# Altium PCB ConstSegmentClock - Logic.PcbDoc
Units mm, origin at the board's own origin, x right, y up, seen from the top; angles counter-clockwise.
Board outline 50.8 x 20.32 mm, 2 copper layers (Component Side, Bottom Layer), stack 1.57 mm thick; 36 components, 47 nets, 133 pads, 38 vias.
Unrouted connection lines stored in the file: 22.
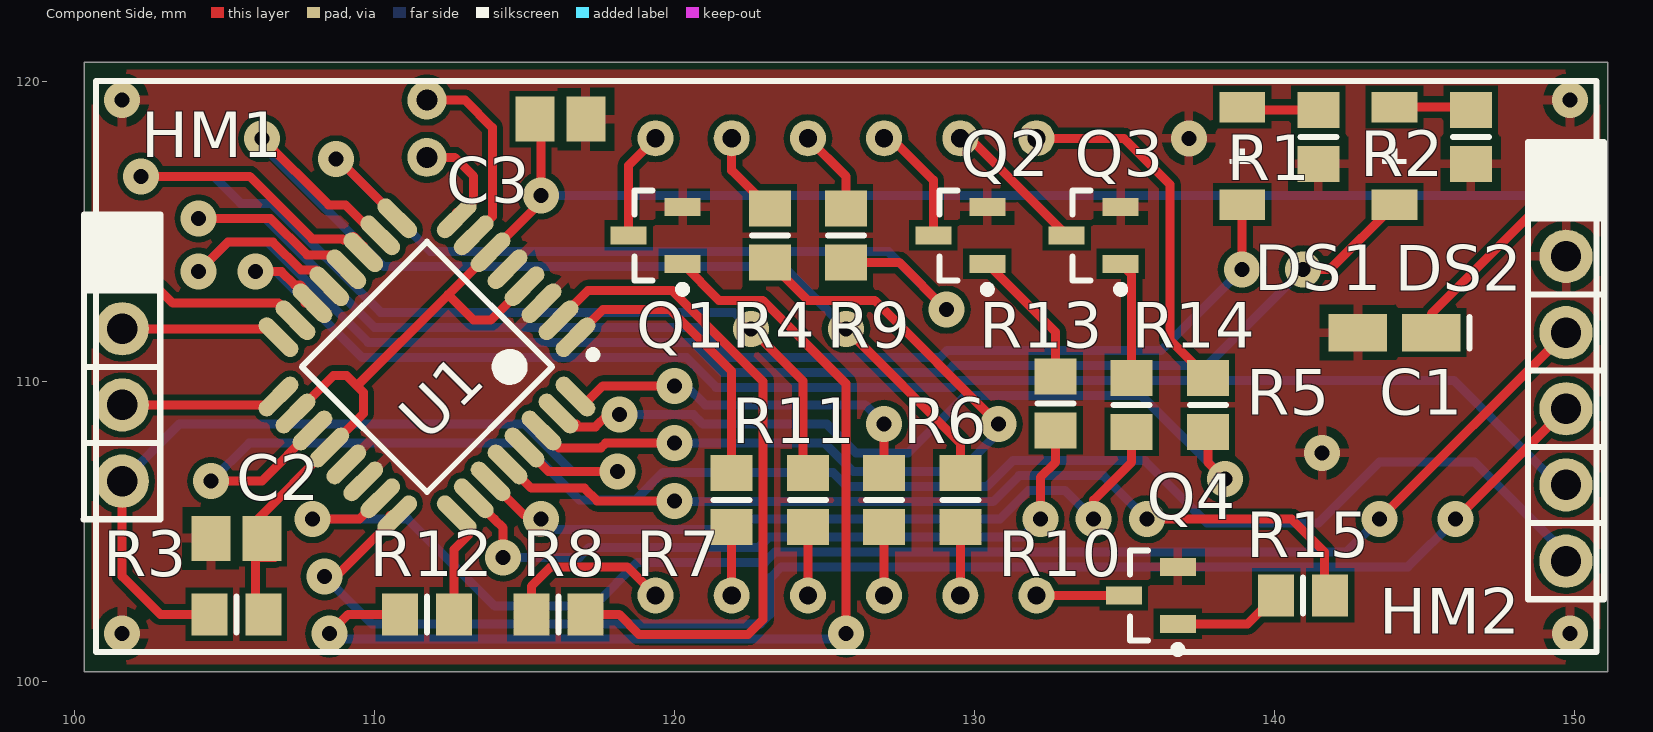
[diagram p0: Component Side view]
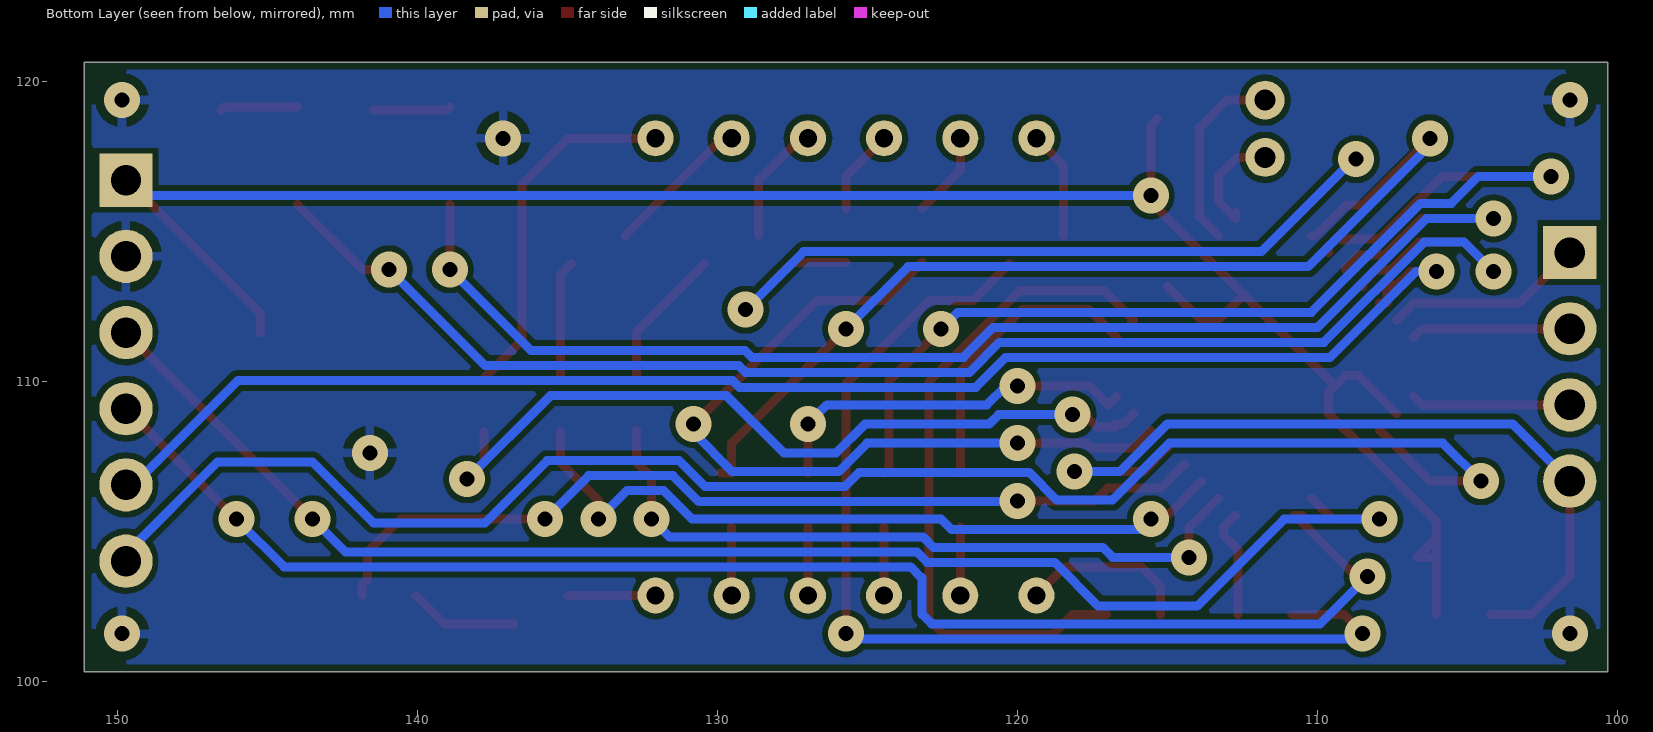
[diagram p1: Bottom Layer view, seen from below]

## Layer stack, top to bottom
Top Solder: solder mask 0.0102, Solder Resist, Dk 3.5
Component Side: signal copper 0.0356
Dielectric 1: core 1.4986, FR-4, Dk 4.2
Bottom Layer: signal copper 0.0356
Solder Side: solder mask 0.0102, Solder Resist, Dk 3.5

## Board outline
100.33,100.33 100.33,120.65 151.13,120.65 151.13,100.33

## Design rules (kind name [scope] priority, off if disabled: settings)
AcuteAngle "AcuteAngle 90" [All] p1: minimum=9.00000000000000E+0001 checktracksonly=FALSE
Clearance "Clearance 0.2" [All] p1: gap=0.2
DiffPairsRouting "DiffPairsRouting 0.2/0.2" [All] p1: maxlimit=0.2 minlimit=0.2 mostfreqgap=0.2 toplayer_minwidth=0.2 toplayer_maxwidth=0.2 toplayer_prefwidth=0.2 bottomlayer_minwidth=0.2 bottomlayer_maxwidth=0.2 bottomlayer_prefwidth=0.2 maxuncoupledlength=12.7
HoleSize "HoleSize 0.5" [All] p1: absolutevalues=TRUE maxlimit=2.54 minlimit=0.5 maxpercent=80.000 minpercent=20.000
MinimumAnnularRing "MinimumAnnularRing 0.35" [All] p1: minimumring=0.35
PlaneConnect "PlaneConnect 0.3 0.3" [All] p1: planeconnectstyle=Relief reliefexpansion=0.508 reliefentries=4 reliefconductorwidth=0.3 reliefairgap=0.3
PolygonConnect "PolygonConnect 0.3 0.3" [All] p1: connectstyle=Relief reliefconductorwidth=0.3 reliefentries=4 polygonreliefangle="90 Angle" airgapwidth=0.3
RoutingVias "RoutingVias 0.5 1.2" [All] p1: holewidth=0.5 width=1.2 viastyle="Through Hole" minholewidth=0.5 minwidth=1.2 maxholewidth=0.5 maxwidth=1.2
SMDEntry "SMDEntry Corner" [All] p1: side=FALSE corner=TRUE anyangle=FALSE
SolderMaskExpansion "SolderMaskExpansion 0.1" [All] p1: expansion=0.1
Width "Width 0.2/0.3/0.4" [All] p1: maxlimit=0.4 minlimit=0.2 preferedwidth=0.3 minimp=50.000000 maximp=50.000000 favimp=50.000000
27 further rules are at their usual default settings.

## Components (designator, comment, footprint, x,y, rotation, side; value= is the part's Value field where it differs from the comment)
B1 "XCPT14A4005PX" XCPT14A4005PX 107.188,164.846 r90 bottom
C1 "4.7uF" KEMET_A 144.018,111.633 r180 top
C2 "0.1uF" CAPC2012N 105.41,104.775 r0 top
C3 "0.1uF" CAPC2012N 116.205,118.745 r180 top
C4 "10uF" KEMET_A 119.888,164.846 r180 top
C5 "10uF" KEMET_A 119.888,168.656 r180 top
DS1 "OK" LED_1206 138.938,117.521 r90 top
DS2 "LOL" LED_1206 144.018,117.521 r90 top
HM1 "68001-204HLF" HEADER-1X4 101.6,114.3 r0 top locked
HM2 "68001-206HLF" HEADER-1X6 149.733,116.713 r0 top locked
J1 "KLDX-0202" KLDX-0202 137.668,172.546 r270 bottom
Q1 "BC817" SOT23-3L 119.38,114.874 r180 top
Q2 "BC817" SOT23-3L 129.54,114.874 r180 top
Q3 "BC817" SOT23-3L 133.985,114.874 r180 top
Q4 "BC817" SOT23-3L 135.89,102.87 r180 top
R1 "270" RESC2012N 141.478,118.156 r270 top
R2 "270" RESC2012N 146.558,118.156 r270 top
R3 "10K" RESC2012N 105.41,102.235 r180 top
R4 "270" RESC2012N 123.19,114.874 r270 top
R5 "270" RESC2012N 137.795,109.22 r270 top
R6 "270" RESC2012N 127,106.045 r90 top
R7 "270" RESC2012N 121.92,106.045 r90 top
R8 "270" RESC2012N 116.144,102.235 r0 top
R9 "270" RESC2012N 125.73,114.874 r270 top
R10 "270" RESC2012N 129.54,106.045 r90 top
R11 "270" RESC2012N 124.46,106.045 r90 top
R12 "1K" RESC2012N 111.76,102.235 r180 top
R13 "1K" RESC2012N 132.715,109.269 r90 top
R14 "1K" RESC2012N 135.255,109.22 r90 top
R15 "1K" RESC2012N 140.97,102.87 r180 top
R16 "270" RESC2012N 130.048,163.576 r90 bottom
R17 "270" RESC2012N 130.048,156.326 r90 bottom
SW1 "KAN0641-0431B" KAN0641 122.428,167.386 r180 bottom
SW2 "KAN0641-0431B" KAN0641 122.428,158.496 r180 bottom
U1 "ATmega48PA-AU" 32A_N 111.76,110.49 r225 top
U2 "REG1117-3.3" TI-DCY4_N 128.778,167.386 r0 top

## Footprints (in the part's own frame and the unit in brackets; to place one, negate y for a bottom-side part, rotate by r counter-clockwise, add the part's x,y. Pads: shape width x height; smd on the part's side, far side on the other; paste and mask are expansions set on the pad)
32A_N [mm] "Thin QFP, 32-Leads, Body 7x7mm, Pitch 0.8mm, IPC Medium Density"
  oval 1.65x0.55 smd: 1(-4.2,2.8) 2(-4.2,2) 3(-4.2,1.2) 4(-4.2,0.4) 5(-4.2,-0.4) 6(-4.2,-1.2) 7(-4.2,-2) 8(-4.2,-2.8) 17(4.2,-2.8) 18(4.2,-2) 19(4.2,-1.2) 20(4.2,-0.4) 21(4.2,0.4) 22(4.2,1.2) 23(4.2,2) 24(4.2,2.8)
  oval 0.55x1.65 smd: 9(-2.8,-4.2) 10(-2,-4.2) 11(-1.2,-4.2) 12(-0.4,-4.2) 13(0.4,-4.2) 14(1.2,-4.2) 15(2,-4.2) 16(2.8,-4.2) 25(2.8,4.2) 26(2,4.2) 27(1.2,4.2) 28(0.4,4.2) 29(-0.4,4.2) 30(-1.2,4.2) 31(-2,4.2) 32(-2.8,4.2)
  silkscreen extent -4.32,-2.95 2.95,3.75, body extent -3.5,-3.5 3.5,3.5, height 1.2
CAPC2012N [mm] "Chip Capacitor, Body 2.0x1.3mm, IPC Medium Density"
  rect 1.3x1.5 smd: 1(-0.85,0) 2(0.85,0)
  body extent -1.1,-0.72 1.1,0.72, height 1.1
HEADER-1X4 [mil]
  rect 70x70 hole 40: 1(0,0)
  round 70 hole 40: 2(0,-100) 3(0,-200) 4(0,-300)
  silkscreen extent -51,-350 50,50, body extent -50,-350 50,50, height 470
HEADER-1X6 [mil]
  rect 70x70 hole 40: 1(0,0)
  round 70 hole 40: 2(0,-100) 3(0,-200) 4(0,-300) 5(0,-400) 6(0,-500)
  silkscreen extent -50,-550 50,50, body extent -50,-550 50,50, height 470
KAN0641 [mm]
  rect 2x1.2 smd: 1(-4.25,2.25) 2(4.25,2.25) 3(4.25,-2.25)
  rect 2.2x1.2 smd: 4(-4.25,-2.25)
  silkscreen extent -3,-3 3.02,3.02, body extent -5.1,-3.1 4.9,2.9, height 5.07
KEMET_A [mm] "Molded Capacitor, 2-Leads, Body 3.2x1.6mm, IPC Medium Density"
  rect 1.95x1.25 smd: 1(-1.225,0) 2(1.225,0)
  silkscreen extent -2.5,-0.53 -2.5,0.53, body extent -1.7,-0.9 1.7,0.9, height 1.8
KLDX-0202 [mm]
  oval 2x5 hole 1 slot 3.5 at 90 deg: 1(13.9,0) 2(7.7,0)
  oval 5x2 hole 1 slot 3.5 at 0 deg: 3(10.7,-4.7)
  silkscreen extent 0,-4.32 14.5,4.32, body extent -0.4,-4.7 14.8,4.7, height 11
LED_1206 [mil]
  rect 40x60 smd: 1(-64,0) 2(64,0)
  silkscreen extent -10,-16 10,16, body extent -63,-31 63,31
RESC2012N [mm] "Chip Resistor, Body 2.0x1.3mm, IPC Medium Density"
  rect 1.2x1.4 smd: 1(-0.9,0) 2(0.9,0)
  silkscreen extent 0,-0.6 0,0.6, body extent -1.07,-0.7 1.07,0.7, height 0.65
SOT23-3L [mm] "SOT23, 3-Leads, Body 2.9x1.3mm, Pitch 0.95mm, Lead Span 2.5mm, IPC High Density"
  rect 1.2x0.6 smd: 1(-0.9,0.95) 2(-0.9,-0.95) 3(0.9,0)
  silkscreen extent -1.02,-1.5 0.7,1.92, body extent -0.7,-1.5 0.7,1.5, height 1.1
TI-DCY4_N [mm] "SOT223, 4-Leads, Body 6.5x3.5mm, Pitch 2.3mm, IPC Medium Density"
  rect 1.85x1 smd: 1(-3.175,2.3) 2(-3.175,0) 3(-3.175,-2.3)
  rect 1.85x3.2 smd: 4(3.175,0)
  silkscreen extent -3.3,-3.35 1.95,3.47, body extent -1.85,-3.35 1.85,3.35, height 1.8
XCPT14A4005PX [mm]
  rect 2x2 hole 1.016: 1(-3.81,0)
  round 2 hole 1.016: 2(3.81,0)
  silkscreen extent -7,-7 7,7, body extent -6.94,-6.99 7,6.99, height 7.2

## Part data
B1: "Piezoelectric ceramic buzzer"
C1 C4 C5: library part T491A***K***AH, "A size, STANDARD Tantalum Surface Mount Capacitors"
C2 C3: library part CGA4**X7R***********, "0805 size MULTILAYER CERAMIC CHIP CAPACITOR, General (Up to 50V)"
DS1 DS2: library part QTLP650C4TR, "Green LED, STANDARD BRIGHT 1206"
HM1: "1x4 PIN HEADER .100\" SR STRAIGHT"
HM2: "1x6 PIN HEADER .100\" SR STRAIGHT"
J1: "Low Voltage Power Supply Connector"
Q1 Q2 Q3 Q4: "45 V, 500 mA NPN general-purpose transistors"
R1 R2 R3 R4 R5 R6 R7 R8 R9 R10 R11 R12 R13 R14 R15 R16 R17: library part ERJ6GEYJ***V, "0805 size, STANDARD thick Film Chip Resistor"
SW1 SW2: "Tact switch, button SMD"
U1: "8-bit AVR Microcontroller, 4KB Flash, 256 Bytes EEPROM, 512 Bytes SRAM, 32-pin TQFP, Industrial Grade (-40°C to 85°C)"

## Free pads (board coordinates)
  round 1.3 hole 0.7: 1(111.76,117.475) 2(111.76,119.38)
  round 1.2 hole 0.61: 1(119.38,102.87) 2(121.92,102.87) 3(124.46,102.87) 4(127,102.87) 5(129.54,102.87) 6(132.08,102.87) 7(132.08,118.11) 8(129.54,118.11) 9(127,118.11) 10(124.46,118.11) 11(121.92,118.11) 12(119.38,118.11)

## Via types
v1: diameter 1.2, hole 0.5, Component Side to Bottom Layer, 38 vias

## Nets (pads, with @x,y where several pads share a name; then routed paths per layer and width w, separated by ;. In a path a pad name is that pad's centre, name@x,y a point inside that pad or via, vN(x,y) a via of type N, cw(c..) or ccw(c..) an arc to the next point about the centre after c; other vN are vias at no path point)
DISP_A: R4.2 U1.30 | length 26.6
  Component Side w0.3: U1.30 116.162,107.785 117.555,107.785 117.716,107.947 v1(120.012,107.947) ; R4.2 124.454,112.71 126.685,112.71 v1(130.81,108.585)
  Bottom Layer w0.3: v1(120.012,107.947) 125.023,107.947 125.973,106.997 129.517,106.997 130.81,108.29 v1(130.81,108.585)
DISP_B: R5.2 U1.31 | length 26.9
  Component Side w0.3: U1.31 116.493,108.585 116.741,108.585 116.741,108.486 117.376,108.486 117.79,108.9 v1(118.174,108.9) ; R5.2 137.795,107.315 v1(138.366,106.744)
  Bottom Layer w0.3: v1(118.174,108.9) 120.644,108.9 120.959,108.585 125.092,108.585 126.057,107.62 127.801,107.62 129.716,109.535 135.575,109.535 v1(138.366,106.744)
DISP_C: R6.2 U1.32 | length 12.8
  Component Side w0.3: U1.32 116.99,109.22 117.625,109.855 v1(120.015,109.855) ; R6.2 v1(127,108.585)
  Bottom Layer w0.3: v1(120.015,109.855) 120.396,109.855 121.031,109.22 126.365,109.22 v1(127,108.585)
DISP_D: R7.2 U1.1 | length 9.8
  Component Side w0.3: U1.1 117.625,112.395 119.869,112.395 121.92,110.344 R7.2
DISP_DIGIT_0: R12.1 U1.25 | length 3.7
  Component Side w0.3: R12.1 112.66,104.397 113.139,104.876 113.139,105.151 U1.25
DISP_DIGIT_1: R13.1 U1.26 | length 24
  Component Side w0.3: U1.26 114.012,105.41 114.3,105.122 v1(114.3,104.14) ; v1(132.207,105.41) 132.207,106.807 132.715,107.315 R13.1
  Bottom Layer w0.3: v1(114.3,104.14) 116.84,104.14 117.175,104.475 122.818,104.475 123.163,104.82 131.617,104.82 v1(132.207,105.41)
DISP_DIGIT_2: R14.1 U1.27 | length 25.1
  Component Side w0.3: U1.27 114.978,105.575 115.405,105.575 v1(115.57,105.41) ; v1(133.985,105.41) 133.985,106.045 135.255,107.315 R14.1
  Bottom Layer w0.3: v1(115.57,105.41) 115.91,105.07 122.215,105.07 122.555,105.41 130.863,105.41 131.813,106.36 133.035,106.36 v1(133.985,105.41)
DISP_DIGIT_3: R15.1 U1.28 | length 30.7
  Component Side w0.3: U1.28 115.239,106.445 117.009,106.445 117.434,106.02 v1(120.015,106.02) ; v1(135.763,105.41) 140.589,105.41 141.676,104.323 141.676,103.4 141.87,103.205 R15.1
  Bottom Layer w0.3: v1(120.015,106.02) 120.038,105.997 130.635,105.997 131.498,106.86 134.313,106.86 v1(135.763,105.41)
DISP_DP: R11.2 U1.11 | length 36.7
  Component Side w0.3: v1(102.235,116.84) 105.85,116.84 107.933,114.757 108.943,114.757 108.98,114.72 109.2,114.72 109.318,114.837 109.639,114.516 U1.11 ; v1(122.555,111.76) 124.295,110.02 124.295,107.11 R11.2
  Bottom Layer w0.3: v1(102.235,116.84) 104.652,116.84 105.552,115.94 106.577,115.94 110.212,112.305 122.01,112.305 v1(122.555,111.76)
DISP_E: R8.2 U1.2 | length 22.9
  Component Side w0.3: U1.2@116.21,111.98 U1.2 117.128,113.03 119.941,113.03 122.97,110.001 122.97,102.072 122.461,101.563 118.837,101.563 118.165,102.235 R8.2
DISP_F: R9.2 U1.9 | length 29.3
  Component Side w0.3: v1(108.724,117.411) 108.799,117.411 U1.9 ; R9.2 127.498,113.974 v1(129.077,112.395)
  Bottom Layer w0.3: v1(108.724,117.411) 108.799,117.411 111.88,114.33 127.142,114.33 v1(129.077,112.395)
DISP_G: R10.2 U1.10 | length 34.5
  Component Side w0.3: v1(106.26,118.11) 108.48,115.89 109.039,115.89 110.055,114.874 U1.10 ; v1@125.514,111.838 125.591,111.76 v1(125.73,111.76) 129.54,107.95 R10.2 R10.2@129.91,106.945
  Bottom Layer w0.3: v1(106.26,118.11) 106.26,117.895 110.325,113.83 123.66,113.83 v1(125.73,111.76)
GND: B1.2 C1.2 C2.1 C3.1 C4.2 C5.2 HM2.2 J1.2 J1.3 Q1.2 Q2.2 Q3.2 Q4.2 R1.2 R2.2 SW1.3 SW1.4 SW2.3 SW2.4 U1.3 U1.5 U1.21 U1.22 U2.1
  other v1: 101.6,101.6 149.86,101.6 141.605,107.62 137.16,118.11 101.6,119.38 149.86,119.38
MCU_AIN: HM2.6 U1.19 | length 54.7
  Component Side w0.3: v1(104.56,106.68) 106.253,106.68 U1.19
  Bottom Layer w0.3: v1(104.56,106.68) 105.83,107.95 114.948,107.95 116.851,106.047 118.698,106.047 119.621,106.97 125.293,106.97 125.766,106.497 130.428,106.497 131.291,107.36 135.693,107.36 137.77,105.283 141.478,105.283 143.51,107.315 146.685,107.315 149.733,104.267 HM2.6
MCU_BUTT_0: HM2.3 R16.1 U1.23 | length 49.3
  Component Side w0.3: v1(107.95,105.41) 109.508,105.41 U1.23 ; v1(143.51,105.41) HM2.3
  Bottom Layer w0.3: v1(107.95,105.41) 111.125,105.41 114.022,102.513 117.313,102.513 118.775,103.975 123.025,103.975 123.37,104.32 142.42,104.32 v1(143.51,105.41)
MCU_BUTT_1: HM2.4 R17.1 U1.24 | length 49.3
  Component Side w0.3: v1(108.342,103.505) 108.735,103.505 U1.24 U1.24@110.523,105.54 ; v1(146.05,105.41) HM2.4
  Bottom Layer w0.3: v1(108.342,103.505) 109.927,101.92 122.875,101.92 123.19,102.235 123.19,103.475 123.232,103.475 123.577,103.82 144.46,103.82 v1(146.05,105.41)
MCU_BUZZ: B1.1 HM2.5 U1.14 | length 49.4
  Component Side w0.3: v1(106.045,113.665) 106.904,113.665 107.349,113.22 107.534,113.22 107.694,113.06 107.694,112.611 U1.14
  Bottom Layer w0.3: v1(106.045,113.665) 106.731,113.665 109.591,110.805 120.409,110.805 121.404,109.81 129.284,109.81 129.509,110.035 146,110.035 149.482,106.553 HM2.5
MCU_LED_0: DS1.1 U1.12 | length 45.8
  Component Side w0.3: v1(104.14,115.44) 106.543,115.44 107.763,114.22 108.658,114.22 109.073,113.805 U1.12 ; v1(138.938,113.743) DS1.1
  Bottom Layer w0.3: v1(104.14,115.44) 106.37,115.44 110.005,111.805 120.823,111.805 121.818,110.81 128.87,110.81 129.095,111.035 136.23,111.035 v1(138.938,113.743)
MCU_LED_1: DS2.1 U1.13 | length 49.8
  Component Side w0.3: v1(104.14,113.665) 105.125,114.65 106.626,114.65 107.556,113.72 108.066,113.72 108.507,113.279 U1.13 ; v1(140.97,113.743) 141.865,113.743 DS2.1
  Bottom Layer w0.3: v1(104.14,113.665) 105.125,114.65 106.453,114.65 109.798,111.305 120.616,111.305 121.611,110.31 129.077,110.31 129.302,110.535 137.762,110.535 v1(140.97,113.743)
MISO: HM1.2 U1.16 | length 5.3
  Component Side w0.3: HM1.2 106.53,111.76 U1.16
MOSI: HM1.1 U1.15 | length 6.7
  Component Side w0.3: HM1.1@101.608,114.308 HM1.1 103.289,112.611 106.81,112.611 U1.15
N_SYS_RESET: HM1.4 R3.2 U1.29 | length 27.7
  Component Side w0.3: HM1.4 101.6,103.505 102.87,102.235 R3.2@104.245,102.235 ; U1.29 115.819,106.997 v1(118.11,106.997)
  Bottom Layer w0.3: HM1.4 103.505,108.585 115.02,108.585 116.608,106.997 v1(118.11,106.997)
NetC4_1: C4.1 J1.1 U2.3
NetDS1_2: DS1.2 R1.1 | length 2.6
  Component Side w0.3: DS1.2 139.029,119.056 R1.1
NetDS2_2: DS2.2 R2.1 | length 2.6
  Component Side w0.3: DS2.2 146.467,119.147 R2.1
NetDS3_1: pad.1@119.38,102.87 R8.1 | length 5.7
  Component Side w0.3: R8.1 115.244,103.171 115.893,103.82 118.43,103.82 pad.1@119.38,102.87
NetDS3_2: pad.2@121.92,102.87 R7.1 | length 2.3
  Component Side w0.3: pad.2@121.92,102.87 R7.1
NetDS3_3: pad.3 R11.1 | length 2.3
  Component Side w0.3: pad.3 R11.1
NetDS3_4: pad.4 R6.1 | length 2.3
  Component Side w0.3: pad.4 R6.1
NetDS3_5: pad.5 R10.1 | length 2.3
  Component Side w0.3: pad.5 R10.1
NetDS3_6: pad.6 Q4.3 | length 2.9
  Component Side w0.3: pad.6 Q4.3
NetDS3_7: pad.7 R5.1 | length 12.1
  Component Side w0.3: pad.7 134.99,118.11 136.525,116.575 136.525,111.39 R5.1
NetDS3_8: pad.8 Q3.3 | length 4.9
  Component Side w0.3: pad.8 129.849,118.11 Q3.3
NetDS3_9: pad.9 Q2.3 | length 4.1
  Component Side w0.3: pad.9 127.243,118.11 128.64,116.713 Q2.3
NetDS3_10: pad.10 R9.1 | length 2.9
  Component Side w0.3: pad.10 125.73,116.84 R9.1
NetDS3_11: pad.11 R4.1 | length 2.9
  Component Side w0.3: pad.11 121.92,117.044 R4.1
NetDS3_12: pad.12 Q1.3 | length 3.6
  Component Side w0.3: Q1.3 118.48,117.21 pad.12
NetQ1_1: Q1.1 R12.2 | length 35.4
  Component Side w0.3: v1(108.507,101.6) 109.142,102.235 R12.2 ; Q1.1 121.494,112.71 122.949,112.71 125.73,109.929 v1(125.73,101.6)
  Bottom Layer w0.3: v1(108.507,101.6) 108.687,101.42 125.55,101.42 v1(125.73,101.6)
NetQ2_1: Q2.1 R13.2 | length 4.7
  Component Side w0.3: Q2.1 132.715,111.649 R13.2
NetQ3_1: Q3.1 R14.2 | length 4
  Component Side w0.3: Q3.1 135.255,113.554 R14.2
NetQ4_1: Q4.1 R15.2 | length 3.7
  Component Side w0.3: Q4.1 139.12,101.92 R15.2
NetR16_2: R16.2 SW1.1 SW1.2
NetR17_2: R17.2 SW2.1 SW2.2
NetU1_7: pad.2@111.76,119.38 U1.7 | length 6.4
  Component Side w0.3: pad.2@111.76,119.38 113.03,119.38 113.943,118.467 113.943,115.502 U1.7
NetU1_8: pad.1@111.76,117.475 U1.8 | length 3.7
  Component Side w0.3: pad.1@111.76,117.475 112.681,117.475 113.316,116.84 113.316,116.023 113.324,116.014 U1.8 U1.8@112.75,115.639
SCK: HM1.3 U1.17 | length 5.3
  Component Side w0.3: HM1.3 106.53,109.22 U1.17
VCC3V3: C1.1 C2.2 C3.2 C5.1 HM2.1 R3.1 U1.4 U1.6 U1.18 U1.20 U2.2 U2.4 | length 69.7
  Component Side w0.3: R3.1@106.045,102.235 C2.2@106.045,104.14 ; U1.18 108.646,110.204 109.073,110.204 109.422,109.855 ; U1.4 113.881,112.046 113.316,112.046 112.467,112.894 ; C3.2 115.57,118.53 v1(115.57,116.205) 115.57,115.997 112.467,112.894 ; C1.1 145.243,112.258 149.698,116.713 HM2.1 ; C2.2@106.045,104.14 C2.2@106.045,104.775 ; C2.2@106.045,104.14 106.68,104.14 C2.2@106.045,104.775 ; C2.2@106.045,104.775 106.045,105.341 U1.20 109.639,108.934 109.639,109.639 109.422,109.855 ; 109.422,109.855 109.428,109.855 112.467,112.894
  Bottom Layer w0.3: v1(115.57,116.205) 149.225,116.205 HM2.1

## Polygon pours and split planes (outlines as drawn)
GND on Component Side "CSF" (solid, remove dead copper, pour order 2): 100.584,120.396 100.584,100.584 150.876,100.584 150.876,120.396
GND on Bottom Layer "BSF" (solid, remove dead copper, pour order 4): 100.584,120.396 100.584,100.584 150.876,100.584 150.876,120.396

## Silkscreen, mask and mechanical layers (free items; w line width, h text height)
Top Overlay:
  lines w0.203: 100.73,100.99 100.73,120.015 150.749,120.015 150.749,100.99 100.73,100.99
Dimensions:
  lines w0.254: 23,0 32,0 30,0 31,0 33,0
Board Outline:
  the board outline again, w0.254
Top Courtyard:
  lines w0.2: 99.695,100.33 151.765,100.33 151.765,120.65 99.695,120.65 99.695,100.33